# Altium PCB Balancing_Robot_1_1.PcbDoc (part 2 of 3)
Units mm, origin at the board's own origin, x right, y up, seen from the top; angles counter-clockwise.
Board outline 27 x 60 mm, 6 copper layers (Top Layer, Int1 (GND), Int2 (Sign), Int3 (Sign), Int4 (PWR), Bottom Layer), stack 1.571 mm thick; 139 components, 119 nets, 602 pads, 326 vias.
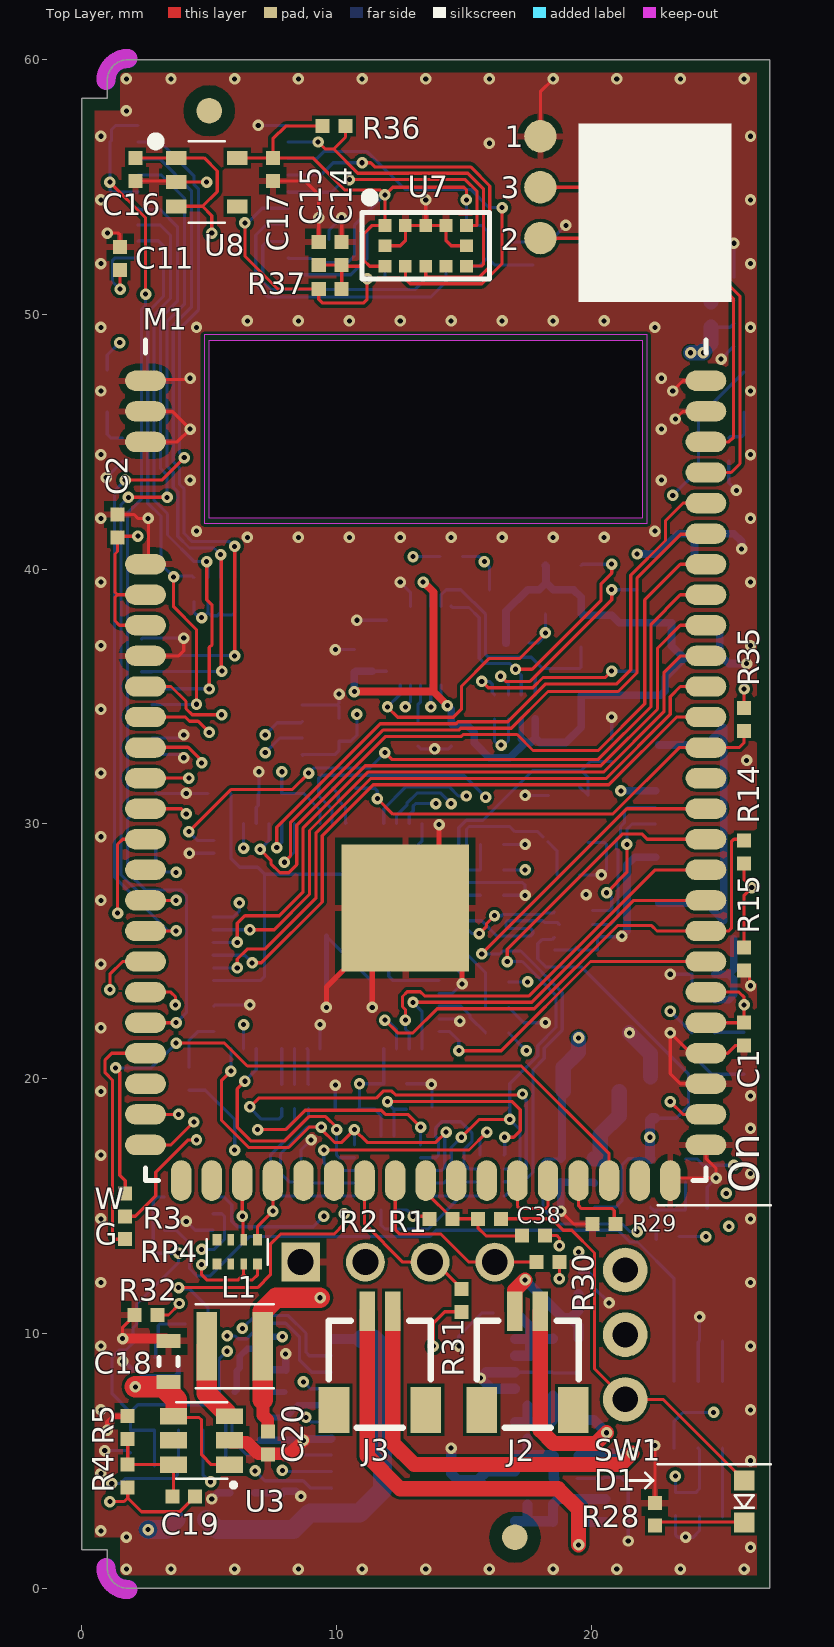
[diagram p0: Top Layer view]

## Part data (continued)
R9 R17: "RES 1M OHM 1/10W 1% 0402 SMD", Manufacturer="Panasonic Electronic Components", Manufacturer Part Number=ERJ-2RKF1004X, Package / Case="0402 (1005 Metric)", Power (Watts)="0.1W, 1/10W", Supplier Device Package=0402, Supplier Part Number 1=P1.00MLCT-ND, Temperature Coefficient=±100ppm/°C, Tolerance=±1%, Category=Resistors, ComponentLink1Description=http://industrial.panasonic.com/www-cgi/jvcr13pz.cgi?E+PZ+3+AOA0002+ERJ2RKF1004X+7+WW, ComponentLink1URL=http://industrial.panasonic.com/www-cgi/jvcr13pz.cgi?E+PZ+3+AOA0002+ERJ2RKF1004X+7+WW, Composition="Thick Film", Features=-, Height="0.016\" (0.40mm)", Number of Terminations=2, Packaging="Cut Tape (CT)", Pricing 1="1=0.07, 50=0.0128, 100=0.0097, 250=0.0072, 500=0.00532, 1000=0.00355, 5000=0.0025 (GBP)", Resistance (Ohms)=1M, RoHS="RoHS Compliant", Size / Dimension="0.039\" L x 0.020\" W (1.00mm x 0.50mm)", Stock 1=749171, Supplier 1=Digi-Key
R10 R14 R15 R26 R27 R30 R31: "RES 2.2K OHM 1/10W 1% 0402 SMD", Manufacturer="Panasonic Electronic Components", Manufacturer Part Number=ERJ-2RKF2201X, Package / Case="0402 (1005 Metric)", Power (Watts)="0.1W, 1/10W", Supplier Device Package=0402, Supplier Part Number 1=P2.20KLCT-ND, Temperature Coefficient=±100ppm/°C, Tolerance=±1%, Category=Resistors, ComponentLink1Description=http://industrial.panasonic.com/www-cgi/jvcr13pz.cgi?E+PZ+3+AOA0002+ERJ2RKF2201X+7+WW, ComponentLink1URL=http://industrial.panasonic.com/www-cgi/jvcr13pz.cgi?E+PZ+3+AOA0002+ERJ2RKF2201X+7+WW, Composition="Thick Film", Features=-, Height="0.016\" (0.40mm)", Number of Terminations=2, Packaging="Cut Tape (CT)", Pricing 1="1=0.07, 50=0.0128, 100=0.0097, 250=0.0072, 500=0.00532, 1000=0.00355, 5000=0.0025 (GBP)", Resistance (Ohms)=2.2K, RoHS="RoHS Compliant", Size / Dimension="0.039\" L x 0.020\" W (1.00mm x 0.50mm)", Stock 1=529147, Supplier 1=Digi-Key
R16: "RES 154K OHM 1/10W 1% 0402 SMD", Manufacturer="Panasonic Electronic Components", Manufacturer Part Number=ERJ-2RKF1543X, Package / Case="0402 (1005 Metric)", Power (Watts)="0.1W, 1/10W", Supplier Device Package=0402, Supplier Part Number 1=P154KLCT-ND, Temperature Coefficient=±100ppm/°C, Tolerance=±1%, Category=Resistors, ComponentLink1Description=http://industrial.panasonic.com/www-cgi/jvcr13pz.cgi?E+PZ+3+AOA0002+ERJ2RKF1543X+7+WW, ComponentLink1URL=http://industrial.panasonic.com/www-cgi/jvcr13pz.cgi?E+PZ+3+AOA0002+ERJ2RKF1543X+7+WW, Composition="Thick Film", Features=-, Height="0.016\" (0.40mm)", Number of Terminations=2, Packaging="Cut Tape (CT)", Pricing 1="1=0.07, 50=0.0128, 100=0.0097, 250=0.0072, 500=0.00532, 1000=0.00355, 5000=0.0025 (GBP)", Resistance (Ohms)=154K, RoHS="RoHS Compliant", Size / Dimension="0.039\" L x 0.020\" W (1.00mm x 0.50mm)", Stock 1=93656, Supplier 1=Digi-Key
R18: "RES 523K OHM 1/10W 1% 0402 SMD", Manufacturer="Panasonic Electronic Components", Manufacturer Part Number=ERJ-2RKF5233X, Package / Case="0402 (1005 Metric)", Power (Watts)="0.1W, 1/10W", Supplier Device Package=0402, Supplier Part Number 1=P523KLCT-ND, Temperature Coefficient=±100ppm/°C, Tolerance=±1%, Category=Resistors, ComponentLink1Description=http://industrial.panasonic.com/www-cgi/jvcr13pz.cgi?E+PZ+3+AOA0002+ERJ2RKF5233X+7+WW, ComponentLink1URL=http://industrial.panasonic.com/www-cgi/jvcr13pz.cgi?E+PZ+3+AOA0002+ERJ2RKF5233X+7+WW, Composition="Thick Film", Features=-, Height="0.016\" (0.40mm)", Number of Terminations=2, Packaging="Cut Tape (CT)", Pricing 1="1=0.07, 50=0.0128, 100=0.0097, 250=0.0072, 500=0.00532, 1000=0.00355, 5000=0.0025 (GBP)", Resistance (Ohms)=523K, RoHS="RoHS Compliant", Size / Dimension="0.039\" L x 0.020\" W (1.00mm x 0.50mm)", Stock 1=62611, Supplier 1=Digi-Key
R19: "RES 100 OHM 1/10W 1% 0402 SMD", Manufacturer="Panasonic Electronic Components", Manufacturer Part Number=ERJ-2RKF1000X, Package / Case="0402 (1005 Metric)", Power (Watts)="0.1W, 1/10W", Supplier Device Package=0402, Supplier Part Number 1=P100LCT-ND, Temperature Coefficient=±100ppm/°C, Tolerance=±1%, Category=Resistors, ComponentLink1Description=http://industrial.panasonic.com/www-cgi/jvcr13pz.cgi?E+PZ+3+AOA0002+ERJ2RKF1000X+7+WW, ComponentLink1URL=http://industrial.panasonic.com/www-cgi/jvcr13pz.cgi?E+PZ+3+AOA0002+ERJ2RKF1000X+7+WW, Composition="Thick Film", Features=-, Height="0.016\" (0.40mm)", Number of Terminations=2, Packaging="Cut Tape (CT)", Pricing 1="1=0.07, 50=0.0128, 100=0.0097, 250=0.0072, 500=0.00532, 1000=0.00355, 5000=0.0025 (GBP)", Resistance (Ohms)=100R, RoHS="RoHS Compliant", Size / Dimension="0.039\" L x 0.020\" W (1.00mm x 0.50mm)", Stock 1=3662159, Supplier 1=Digi-Key
R25: library part THREE-WAY-4K7-0402-NO-SHORT, "RES SMD 4.7K JUMPER 1/10W 0402", Manufacturer="Panasonic Electronic Components", Manufacturer Part Number=ERJ-2RKF4701X, Operating Temperature="-55°C ~ 155°C", Package / Case="0402 (1005 Metric)", Power (Watts)="0.1W, 1/10W", Supplier Device Package=0402, Supplier Part Number=P4.7KLCT-ND, Temperature Coefficient=-, Tolerance=Jumper, Category=Resistors, ComponentLink1Description=http://industrial.panasonic.com/www-cgi/jvcr13pz.cgi?E+PZ+3+AOA0001+ERJ2GE0R00X+7+WW, ComponentLink1URL=http://industrial.panasonic.com/www-cgi/jvcr13pz.cgi?E+PZ+3+AOA0001+ERJ2GE0R00X+7+WW, Composition="Thick Film", Features=-, Height="0.016\" (0.40mm)", Number of Terminations=2, Packaging="Cut Tape (CT)", Part Status=Active, Pricing 1="1=0.08, 50=0.0104, 100=0.0079, 250=0.00588, 500=0.00436, 1000=0.0029, 5000=0.00204 (GBP)", Resistance (Ohms)=4.7K, RoHS="RoHS Compliant", Size / Dimension="0.039\" L x 0.020\" W (1.00mm x 0.50mm)", Stock 1=3259868, Supplier 1=Digi-Key
R28 R33 R34: "RES 330 OHM 1/10W 1% 0402 SMD", Manufacturer="Panasonic Electronic Components", Manufacturer Part Number=ERJ-2RKF3300X, Package / Case="0402 (1005 Metric)", Power (Watts)="0.1W, 1/10W", Supplier Device Package=0402, Supplier Part Number 1=P330LCT-ND, Temperature Coefficient=±100ppm/°C, Tolerance=±1%, Category=Resistors, ComponentLink1Description=http://industrial.panasonic.com/www-cgi/jvcr13pz.cgi?E+PZ+3+AOA0002+ERJ2RKF3300X+7+WW, ComponentLink1URL=http://industrial.panasonic.com/www-cgi/jvcr13pz.cgi?E+PZ+3+AOA0002+ERJ2RKF3300X+7+WW, Composition="Thick Film", Features=-, Height="0.016\" (0.40mm)", Number of Terminations=2, Packaging="Cut Tape (CT)", Pricing 1="1=0.07, 50=0.0128, 100=0.0097, 250=0.0072, 500=0.00532, 1000=0.00355, 5000=0.0025 (GBP)", Resistance (Ohms)=330R, RoHS="RoHS Compliant", Size / Dimension="0.039\" L x 0.020\" W (1.00mm x 0.50mm)", Stock 1=586957, Supplier 1=Digi-Key
R29 R32: "RES 4.7K OHM 1/10W 1% 0402 SMD", Manufacturer="Panasonic Electronic Components", Manufacturer Part Number=ERJ-2RKF4701X, Package / Case="0402 (1005 Metric)", Power (Watts)="0.1W, 1/10W", Supplier Device Package=0402, Supplier Part Number 1=P4.70KLCT-ND, Temperature Coefficient=±100ppm/°C, Tolerance=±1%, Category=Resistors, ComponentLink1Description=http://industrial.panasonic.com/www-cgi/jvcr13pz.cgi?E+PZ+3+AOA0002+ERJ2RKF4701X+7+WW, ComponentLink1URL=http://industrial.panasonic.com/www-cgi/jvcr13pz.cgi?E+PZ+3+AOA0002+ERJ2RKF4701X+7+WW, Composition="Thick Film", Features=-, Height="0.016\" (0.40mm)", Number of Terminations=2, Packaging="Cut Tape (CT)", Pricing 1="1=0.07, 50=0.0128, 100=0.0097, 250=0.0072, 500=0.00532, 1000=0.00355, 5000=0.0025 (GBP)", Resistance (Ohms)=4.7K, RoHS="RoHS Compliant", Size / Dimension="0.039\" L x 0.020\" W (1.00mm x 0.50mm)", Stock 1=1251398, Supplier 1=Digi-Key
RP1 RP2: library part EXB-N8V510JX, "Res Thick Film Array 51 Ohm 5% ±200ppm/C ISOL Molded 8-Pin 0804(4 X 0402) Concave SMD Punched Carrier T/R", Manufacturer="Panasonic / Panasonic ECG", Power Rating per Element=31mW, Resistance=51ohm, Resistance Tolerance="± 5%", Resistor Case Style="0402 [1005 Metric]", Resistor Mounting=SMD, Resistor Terminals="(Not Available)", Supplier Part Number 1=Y10510CT-ND, Temperature Coefficient="± 200ppm/°C", Voltage Rating=50V, ComponentLink1Description=https://datasheet.ciiva.com/30072/aoc0000ce1-30072941.pdf, ComponentLink1URL=https://datasheet.ciiva.com/30072/aoc0000ce1-30072941.pdf, ComponentLink2Description=https://datasheet.ciiva.com/46376/1480003-46376333.pdf, ComponentLink2URL=https://datasheet.ciiva.com/46376/1480003-46376333.pdf, ComponentLink3Description=https://datasheet.ciiva.com/5735/1480003-5735263.pdf, ComponentLink3URL=https://datasheet.ciiva.com/5735/1480003-5735263.pdf, ComponentLink4Description=https://datasheet.ciiva.com/28637/1790599-28637093.pdf, ComponentLink4URL=https://datasheet.ciiva.com/28637/1790599-28637093.pdf, ComponentLink5Description=https://datasheet.ciiva.com/46388/1480003-46388069.pdf, ComponentLink5URL=https://datasheet.ciiva.com/46388/1480003-46388069.pdf, ComponentLink6Description=https://datasheet.ciiva.com/15157/getdatasheetpartid-183543-15157943.pdf, ComponentLink6URL=https://datasheet.ciiva.com/15157/getdatasheetpartid-183543-15157943.pdf, Manufacturer Part Number=EXB-N8V510JX, Network Circuit Type=Isolated, No. of Elements=4, No. of Pins=8, Packaging="Cut Tape", Pricing 1="1=0.1, 10=0.075, 25=0.0544, 50=0.0414, 100=0.0305, 250=0.0233, 500=0.0186, 1000=0.0137, 5000=0.0098 (USD)", Stock 1=62555, Supplier 1=Digikey, SVHC="Diboron trioxide (19-Dec-2012)", SVHC (Secondary)="Lead monoxide (lead oxide) (19-Dec-2012)"
RP3: library part EXB-N8V472JX, "Res Thick Film Array 4.7K Ohm 5% ±200ppm/C ISOL Molded 8-Pin 0804(4 X 0402) Concave SMD Punched Carrier T/R", Manufacturer="Panasonic / Panasonic ECG", Power Rating per Element=31mW, Resistance=4.7kohm, Resistance Tolerance="± 5%", Resistor Case Style="0402 [1005 Metric]", Resistor Mounting=SMD, Resistor Terminals="(Not Available)", Supplier Part Number 1=Y10472CT-ND, Temperature Coefficient="± 200ppm/°C", Voltage Rating=50V, ComponentLink1Description=https://datasheet.ciiva.com/5735/1480003-5735259.pdf, ComponentLink1URL=https://datasheet.ciiva.com/5735/1480003-5735259.pdf, ComponentLink2Description=https://datasheet.ciiva.com/46376/1480003-46376271.pdf, ComponentLink2URL=https://datasheet.ciiva.com/46376/1480003-46376271.pdf, ComponentLink3Description=https://datasheet.ciiva.com/30229/aoc0000ce1-30229813.pdf, ComponentLink3URL=https://datasheet.ciiva.com/30229/aoc0000ce1-30229813.pdf, ComponentLink4Description=https://datasheet.ciiva.com/46387/1480003-46387943.pdf, ComponentLink4URL=https://datasheet.ciiva.com/46387/1480003-46387943.pdf, Manufacturer Part Number=EXB-N8V472JX, Network Circuit Type=Isolated, No. of Elements=4, No. of Pins=8, Packaging="Cut Tape", Pricing 1="1=0.1, 10=0.075, 25=0.0544, 50=0.0414, 100=0.0305, 250=0.0233, 500=0.0186, 1000=0.0137, 5000=0.0098 (USD)", Stock 1=38086, Supplier 1=Digikey, SVHC="Diboron trioxide (19-Dec-2012)", SVHC (Secondary)="Lead monoxide (lead oxide) (19-Dec-2012)"
RP4 RP6: library part EXB-N8V222JX, "Res Thick Film Array 2K2 Ohm 5% ±200ppm/C ISOL Molded 8-Pin 0804(4 X 0402) Concave SMD Punched Carrier T/R", Case Code (Imperial)=0402, Case Code (Metric)=1005, Manufacturer="Panasonic / Panasonic ECG", Power Rating per Element=31mW, Resistance=2.2kohm, Resistance Tolerance="± 5%", Resistor Case Style="0402 [1005 Metric]", Resistor Mounting=SMD, Resistor Terminals="(Not Available)", Supplier Part Number 1=Y10222CT-ND, Temperature Coefficient="± 200ppm/°C", Voltage Rating=50V, ComponentLink1Description=https://datasheet.ciiva.com/28637/1790599-28637084.pdf, ComponentLink1URL=https://datasheet.ciiva.com/28637/1790599-28637084.pdf, ComponentLink2Description=https://datasheet.ciiva.com/46388/1480003-46388015.pdf, ComponentLink2URL=https://datasheet.ciiva.com/46388/1480003-46388015.pdf, ComponentLink3Description=https://datasheet.ciiva.com/5735/1480003-5735240.pdf, ComponentLink3URL=https://datasheet.ciiva.com/5735/1480003-5735240.pdf, ComponentLink4Description=https://datasheet.ciiva.com/30142/aoc0000ce1-30142629.pdf, ComponentLink4URL=https://datasheet.ciiva.com/30142/aoc0000ce1-30142629.pdf, ComponentLink5Description=https://datasheet.ciiva.com/46376/1480003-46376278.pdf, ComponentLink5URL=https://datasheet.ciiva.com/46376/1480003-46376278.pdf, Manufacturer Part Number=EXB-N8V222JX, Network Circuit Type=Isolated, No. of Elements=4, No. of Pins=8, Packaging="Cut Tape", Pricing 1="1=0.1, 10=0.075, 25=0.0544, 50=0.0414, 100=0.0305, 250=0.0233, 500=0.0186, 1000=0.0137, 5000=0.0098 (USD)", Stock 1=17267, Supplier 1=Digikey, SVHC="Diboron trioxide (19-Dec-2012)", SVHC (Secondary)="Lead monoxide (lead oxide) (19-Dec-2012)"
SW1: "SWITCH SLIDE SPDT 500MA 12V", Current Rating=500mA, Manufacturer="Nidec Copal", Max Operating Temperature=85°C, Min Operating Temperature=-40°C, Operating Force=255gf, Supplier Part Number 1=563-1386-ND, Voltage Rating (DC)=12V, Actuator Length=1.4mm, Actuator Type=Standard, ComponentLink1Description=https://datasheet.ciiva.com/18516/02682-18516832.pdf?src-supplier=Digi-Key, ComponentLink1URL=https://datasheet.ciiva.com/18516/02682-18516832.pdf?src-supplier=Digi-Key, Contact Material=Gold, Contact Style=Non-Shorting, Electrical Life=2000Cycles, Lead Free="Lead Free", Manufacturer Part Number=CL-SA-12C4-02, Mechanical Life=10000Cycles, Mount="Through Hole", Packaging=Bulk, Pricing 1="1=2.65000, 10=2.54200, 25=2.48760, 50=2.16320, 100=2.10910, 250=2.05504, 500=1.73056, 1000=1.62240, 5000=1.48720 (USD)", RoHS=Yes, Stock 1=458, Supplier 1=Digi-Key, Switch Function=On-On, Switch Travel=1.6mm, Termination="PC Pin", Throw Configuration=SPDT
U1: "9-axis IMU", Manufacturer=TDK, Supplier Part Number 1=2911498RL, ComponentLink1Description=http://www.farnell.com/datasheets/2632662.pdf?src-supplier=Farnell, ComponentLink1URL=http://www.farnell.com/datasheets/2632662.pdf?src-supplier=Farnell, Manufacturer Part Number=ICM-20948, Pricing 1="150=3.40000, 250=3.21000, 500=3.10000 (GBP)", RoHS=No, Stock 1=0, Supplier 1=Farnell
U2: "DC Motor Driver 3V 24-Pin SSOP T/R", Case/Package=SSOP, Manufacturer=Toshiba, Manufacturer Part Number=TB6612FNG,C,8,EL, Max Operating Temperature=85°C, Max Supply Voltage=5.5V, Min Operating Temperature=-20°C, Min Supply Voltage=2.7V, Operating Supply Voltage=3V, Output Current=1A, Package Quantity=1, Supplier Part Number 1=TB6612FNGC8ELCT-ND, ComponentLink1Description=https://datasheet.ciiva.com/12216/tb6612fng-datasheet-en-20141001-12216529.pdf?src-supplier=Mouser, ComponentLink1URL=https://datasheet.ciiva.com/12216/tb6612fng-datasheet-en-20141001-12216529.pdf?src-supplier=Mouser, Interface=Parallel, Logic Function=AND, Mount="Surface Mount", Number of Outputs=2, Number of Pins=24, Packaging="Tape and Reel", Pricing 1="1=1.95000, 10=1.74900, 25=1.65000, 100=1.32000, 250=1.15500, 500=1.12200, 1000=0.89100 (USD)", RoHS=Yes, Stock 1=11070, Supplier 1=Digi-Key
U3 U14: "Variable voltage buck converter", Case/Package=SOT-23-5, Manufacturer="Texas Instruments", Max Operating Temperature=125°C, Min Operating Temperature=-40°C, Supplier Part Number 1=296-47360-6-ND, Manufacturer Part Number=TLV62569DBVR, Pricing 1="1=1.32, 10=1.176, 100=0.9168, 500=0.75736, 1000=0.59792 (USD)", Stock 1=4987, Supplier 1=Digi-Key
U4: "TEXAS INSTRUMENTS         PCA9546APWR             ANALOG MULTIPLEXER, QUAD 4 X 1, TSSOP-16, FULL REEL", Case/Package=TSSOP, Manufacturer="Texas Instruments", Max Frequency=400kHz, Max Operating Temperature=85°C, Max Power Dissipation=400mW, Max Supply Voltage=5.5V, Min Operating Temperature=-40°C, Min Supply Voltage=2.3V, On-State Resistance=16R, Operating Supply Current=8uA, Package Quantity=2000, Quiescent Current=3uA, Supplier Part Number 1=296-20968-1-ND, Bandwidth=400kHz, ComponentLink1Description=https://datasheet.ciiva.com/15087/getdatasheetpartid-347185-15087370.pdf?src-supplier=Verical, ComponentLink1URL=https://datasheet.ciiva.com/15087/getdatasheetpartid-347185-15087370.pdf?src-supplier=Verical, ComponentLink2Description=https://datasheet.ciiva.com/26839/pca9546apwr-26839938.pdf?src-supplier=IIIC, ComponentLink2URL=https://datasheet.ciiva.com/26839/pca9546apwr-26839938.pdf?src-supplier=IIIC, ComponentLink3Description=https://datasheet.ciiva.com/1784/pca9546a-1784239.pdf?src-supplier=Digi-Key, ComponentLink3URL=https://datasheet.ciiva.com/1784/pca9546a-1784239.pdf?src-supplier=Digi-Key, ComponentLink4Description=https://datasheet.ciiva.com/1784/pca9546a-1784237.pdf?src-supplier=Digi-Key, ComponentLink4URL=https://datasheet.ciiva.com/1784/pca9546a-1784237.pdf?src-supplier=Digi-Key, ComponentLink5Description=https://datasheet.ciiva.com/1784/pca9546a-1784238.pdf?src-supplier=Digi-Key, ComponentLink5URL=https://datasheet.ciiva.com/1784/pca9546a-1784238.pdf?src-supplier=Digi-Key, Contact Plating=Gold, Lead Free="Lead Free", Logic Function=Multiplexer, Manufacturer Part Number=PCA9546APWR, Number of Channels=4, Number of Circuits=4, Number of Inputs=4, Number of Outputs=1, Number of Pins=16, Packaging="Tape and Reel", Power Dissipation=400mW, Pricing 1="1=1.89000, 10=1.70100, 25=1.60520, 100=1.28400, 250=1.12352, 500=1.09140, 1000=0.86670 (USD)", Propagation Delay=1ns, Radiation Hardening=No, REACH SVHC="No SVHC", RoHS=Yes, Stock 1=4404, Supplier 1=Digi-Key, Throw Configuration=4PST, Weight=0.002183oz
U5: "IC 8BIT NON-INV TRANSLTR 20TSSOP", Case/Package=TSSOP, High Level Output Current=-50mA, Low Level Output Current=50mA, Manufacturer="Texas Instruments", Max Operating Temperature=85°C, Max Supply Voltage=5.5V, Min Operating Temperature=-40°C, Min Supply Voltage=1.2V, Nominal Supply Current=8uA, Output Current=620uA, Package Quantity=1, Quiescent Current=3uA, Supplier Part Number 1=296-23011-1-ND, ComponentLink1Description=https://datasheet.ciiva.com/14287/txs0108e-14287280.pdf?src-supplier=Farnell, ComponentLink1URL=https://datasheet.ciiva.com/14287/txs0108e-14287280.pdf?src-supplier=Farnell, ComponentLink2Description=https://datasheet.ciiva.com/15096/getdatasheetpartid-322119-15096276.pdf?src-supplier=Verical, ComponentLink2URL=https://datasheet.ciiva.com/15096/getdatasheetpartid-322119-15096276.pdf?src-supplier=Verical, ComponentLink3Description=https://datasheet.ciiva.com/28653/1714661-28653429.pdf?src-supplier=Element14, ComponentLink3URL=https://datasheet.ciiva.com/28653/1714661-28653429.pdf?src-supplier=Element14, ComponentLink4Description=https://datasheet.ciiva.com/4834/sces642b-127094-4834401.pdf?src-supplier=Mouser, ComponentLink4URL=https://datasheet.ciiva.com/4834/sces642b-127094-4834401.pdf?src-supplier=Mouser, ComponentLink5Description=https://datasheet.ciiva.com/1508/1815244-1508732.pdf?src-supplier=Element14, ComponentLink5URL=https://datasheet.ciiva.com/1508/1815244-1508732.pdf?src-supplier=Element14, ComponentLink6Description=https://datasheet.ciiva.com/1899/txs0108e-1899604.pdf?src-supplier=Digi-Key, ComponentLink6URL=https://datasheet.ciiva.com/1899/txs0108e-1899604.pdf?src-supplier=Digi-Key, ComponentLink7Description=https://datasheet.ciiva.com/1899/txs0108e-1899605.pdf?src-supplier=Digi-Key, ComponentLink7URL=https://datasheet.ciiva.com/1899/txs0108e-1899605.pdf?src-supplier=Digi-Key, ComponentLink8Description=https://datasheet.ciiva.com/1899/txs0108e-1899606.pdf?src-supplier=Digi-Key, ComponentLink8URL=https://datasheet.ciiva.com/1899/txs0108e-1899606.pdf?src-supplier=Digi-Key, ComponentLink9Description=https://datasheet.ciiva.com/14287/txs0108e-14287532.pdf?src-supplier=Avnet, ComponentLink9URL=https://datasheet.ciiva.com/14287/txs0108e-14287532.pdf?src-supplier=Avnet, ComponentLink10Description=https://datasheet.ciiva.com/26039/txs0108e-26039599.pdf?src-supplier=Avnet+Europe, ComponentLink10URL=https://datasheet.ciiva.com/26039/txs0108e-26039599.pdf?src-supplier=Avnet+Europe, Contact Plating=Gold, Data Rate=60Mbps, Height=1.15mm, Lead Free="Lead Free", Length=6.5mm, Logic Function=Translator, Manufacturer Part Number=TXS0108EPWR, Mount="Surface Mount", Number of Bits=8, Number of Channels=8, Number of Inputs=8, Number of Pins=20, Output Type=Voltage, Packaging="Tape and Reel", Pricing 1="1=1.61000, 10=1.44700, 25=1.36520, 100=1.16300, 250=1.09200, 500=0.95550, 1000=0.79170 (USD)", Propagation Delay=4.8ns, Radiation Hardening=No, REACH SVHC="No SVHC", Rise Time=6.3ns, RoHS=Yes, Stock 1=13915, Supplier 1=Digi-Key, Termination=SMD/SMT, Turn-On Delay Time=312ns, Weight=0.002716oz, Width=4.4mm
U6 U7: "OPTICAL LGA12 4.9X2", Manufacturer=STMicroelectronics, Max Operating Temperature=85°C, Min Operating Temperature=-20°C, Supplier Part Number 1=2851946, ComponentLink1Description=http://www.farnell.com/datasheets/2600105.pdf?src-supplier=Farnell, ComponentLink1URL=http://www.farnell.com/datasheets/2600105.pdf?src-supplier=Farnell, ComponentLink2Description=http://www.st.com/content/ccc/resource/technical/document/datasheet/group3/7d/85/c8/95/fb/3b/4e/2d/DM00452094/files/DM00452094.pdf/jcr:content/translations/en.DM00452094.pdf?src-supplier=Digi-Key, ComponentLink2URL=http://www.st.com/content/ccc/resource/technical/document/datasheet/group3/7d/85/c8/95/fb/3b/4e/2d/DM00452094/files/DM00452094.pdf/jcr:content/translations/en.DM00452094.pdf?src-supplier=Digi-Key, Manufacturer Part Number=VL53L1CXV0FY/1, Output Type=I2C, Pricing 1="1=5.68000, 10=4.66000, 25=4.44000, 50=4.15000, 100=3.85000, 250=3.69000, 500=2.93000 (GBP)", RoHS=No, Stock 1=2567, Supplier 1=Farnell
U8: "Reverse Current Protection, 700mA High Speed LDO Regulator", Case/Package=SOT-25, Dropout Voltage=160mV, Manufacturer=Torex, Max Input Voltage=6V, Max Operating Temperature=85°C, Max Power Dissipation=250mW, Min Current Limit=720mA, Min Input Voltage=1.7V, Min Operating Temperature=-40°C, Output Current=700mA, Output Voltage=2.8V, Package Quantity=1, Supplier Part Number 1=893-1141-1-ND, Accuracy=1%, ComponentLink1Description=https://datasheet.ciiva.com/2048/xc6222-2048816.pdf?src-supplier=Digi-Key, ComponentLink1URL=https://datasheet.ciiva.com/2048/xc6222-2048816.pdf?src-supplier=Digi-Key, ComponentLink2Description=https://datasheet.ciiva.com/28427/xc6222-28427291.pdf?src-supplier=Avnet+Europe, ComponentLink2URL=https://datasheet.ciiva.com/28427/xc6222-28427291.pdf?src-supplier=Avnet+Europe, ComponentLink3Description=https://datasheet.ciiva.com/2048/xc6222-2048817.pdf?src-supplier=Digi-Key, ComponentLink3URL=https://datasheet.ciiva.com/2048/xc6222-2048817.pdf?src-supplier=Digi-Key, ComponentLink4Description=https://datasheet.ciiva.com/2048/xc6222-2048815.pdf?src-supplier=Digi-Key, ComponentLink4URL=https://datasheet.ciiva.com/2048/xc6222-2048815.pdf?src-supplier=Digi-Key, Manufacturer Part Number=XC6222B281MR-G, Mount="Surface Mount", Number of Outputs=1, Number of Regulators=1, Output Type=Fixed, Packaging="Cut Tape", Polarity=Positive, Pricing 1="1=0.80000, 10=0.70300, 25=0.66040, 100=0.50060, 250=0.42600, 500=0.40470, 1000=0.30885 (USD)", Radiation Hardening=No, RoHS=Yes, Stock 1=3964, Supplier 1=Digi-Key
U9: "IC USB HS QUAD UART/SYNC 64-QFN", Current - Supply=70mA, Manufacturer="FTDI, Future Technology Devices International Ltd", Manufacturer Part Number=FT4232HQ-REEL, Operating Temperature="-40°C ~ 85°C", Package / Case="64-VFQFN Exposed Pad", Supplier Device Package="64-QFN (9x9)", Supplier Part Number 1=768-1027-1-ND, Voltage - Supply="3 V ~ 3.6 V", Category="Integrated Circuits (ICs)", ComponentLink1Description=http://www.ftdichip.com/Support/Documents/DataSheets/ICs/DS_FT4232H.pdf, ComponentLink1URL=http://www.ftdichip.com/Support/Documents/DataSheets/ICs/DS_FT4232H.pdf, Function="Bridge, USB to UART", Interface=UART, Packaging="Cut Tape (CT)", Pricing 1="1=5.99, 10=5.785, 50=5.5452, 100=4.6827, 250=4.1692, 500=3.79954 (GBP)", Protocol=USB, RoHS="RoHS Compliant", Standards="USB 2.0", Stock 1=18296, Supplier 1=Digi-Key
U10: "IC FILTER COMMON MODE ESD 8WDFN", Current=100mA, DC Resistance (DCR)="8 Ohm", Inductance=-, Manufacturer="ON Semiconductor", Operating Temperature="-40°C ~ 85°C", Package / Case="8-WFDFN Exposed Pad", Standard Package=1, Supplier Part Number 1=EMI2121MTTAGOSCT-ND, Category=Filters, ComponentLink1Description=https://datasheet.ciiva.com/3067/emi2121mt-d-3067884.pdf, ComponentLink1URL=https://datasheet.ciiva.com/3067/emi2121mt-d-3067884.pdf, ComponentLink2Description=https://datasheet.ciiva.com/12394/emi2121mt-d-72518-12394918.pdf, ComponentLink2URL=https://datasheet.ciiva.com/12394/emi2121mt-d-72518-12394918.pdf, ComponentLink3Description=https://datasheet.ciiva.com/6214/emi2121mt-d-6214625.pdf, ComponentLink3URL=https://datasheet.ciiva.com/6214/emi2121mt-d-6214625.pdf, ComponentLink4Description=https://datasheet.ciiva.com/16437/emi2121mt-d-16437709.pdf, ComponentLink4URL=https://datasheet.ciiva.com/16437/emi2121mt-d-16437709.pdf, ComponentLink5Description=https://datasheet.ciiva.com/6214/emi2121mt-d-6214622.pdf, ComponentLink5URL=https://datasheet.ciiva.com/6214/emi2121mt-d-6214622.pdf, ComponentLink6Description=https://datasheet.ciiva.com/6214/emi2121mt-d-6214619.pdf, ComponentLink6URL=https://datasheet.ciiva.com/6214/emi2121mt-d-6214619.pdf, ComponentLink7Description=https://datasheet.ciiva.com/15162/getdatasheetpartid-686641-15162525.pdf, ComponentLink7URL=https://datasheet.ciiva.com/15162/getdatasheetpartid-686641-15162525.pdf, Family="Common Mode Chokes", Filter Type="Data, Signal Line", Height (Max)="0.031\" (0.80mm)", Impedance=-, Manufacturer Part Number=EMI2121MTTAG, Mounting Type="Surface Mount", Number of Lines=2, Online Catalog=EMI, Other Names=EMI2121MTTAGOSDKR, Packaging=Digi-Reel®, PCN Assembly/Origin="DFN Pkg Filters 12/Jun/2013 Addition of FAB 10 Wafer Source 04/Nov/2013 Assembly Site Addition 06/Mar/2014", Pricing 1="1=0.85, 10=0.76, 100=0.5923, 500=0.4893, 1000=0.3863 (USD)", Series=-, Size / Dimension="0.087\" L x 0.079\" W (2.20mm x 2.00mm)", Stock 1=2368, Supplier 1=Digikey
U11: "IC GATE AND 1CH 2-INP SC-70-5", Current - Output High, Low="32mA, 32mA", Current - Quiescent (Max)=2µA, Manufacturer="Fairchild Semiconductor", Operating Temperature="-40°C ~ 85°C", Package / Case="5-TSSOP, SC-70-5, SOT-353", Supplier Device Package=SC-70-5, Supplier Part Number 1=NC7SZ08P5XCT-ND, Voltage - Supply="1.65 V ~ 5.5 V", Category="Integrated Circuits (ICs)", ComponentLink1Description=http://www.fairchildsemi.com/datasheets/NC/NC7SZ08.pdf, ComponentLink1URL=http://www.fairchildsemi.com/datasheets/NC/NC7SZ08.pdf, Features=-, Logic Level - High=-, Logic Level - Low=-, Logic Type="AND Gate", Manufacturer Part Number=NC7SZ08P5X, Max Propagation Delay @ V, Max CL="4.5ns @ 5V, 50pF", Mounting Type="Surface Mount", Number of Circuits=1, Number of Inputs=2, Packaging="Cut Tape (CT)", Part Status=Active, Pricing 1="1=0.26, 10=0.216, 100=0.1144, 500=0.07526, 1000=0.05127 (GBP)", RoHS="RoHS Compliant", Stock 1=29087, Supplier 1=Digi-Key
U12: "LINEAR TECHNOLOGY - LTC6993CS6-2#TRMPBF - GENERATOR, PULSE, TIMERBLOX, 6SOT-23", Digital IC Case=TSOT-23, Frequency=-, Manufacturer="LINEAR TECHNOLOGY", Operating Mode=Monostable, Operating Temperature Max=70, Operating Temperature Min=0, Operating Temperature Range="0°C to +70", Resonator Case=SMD, Supplier Part Number 1=1848054, Supply Voltage Max=5.5, Supply Voltage Min=2.25, Supply Voltage Range="2.25V to 5.5V<!--FANDB--><div class=\"features-and-benefits-container\"><div class=\"features-and-benefits-description\"><span class=\"features-benefits-value\">The LTC6993CS6-2#TRMPBF is a Monostable Pulse Generator (one shot) with a programmable pulse width of 1?s to 33.6 seconds. The LTC6993 is part of the TimerBlox&reg", Clock External Input=No, ComponentLink1Description=http://www.farnell.com/datasheets/1441932.pdf, ComponentLink1URL=http://www.farnell.com/datasheets/1441932.pdf, ComponentLink2Description=http://www.farnell.com/simulation/1753930.zip, ComponentLink2URL=http://www.farnell.com/simulation/1753930.zip, ComponentLink3Description=http://www.farnell.com/datasheets/1999324.pdf, ComponentLink3URL=http://www.farnell.com/datasheets/1999324.pdf, ComponentLink4Description=http://www.farnell.com/cad/1542631.zip, ComponentLink4URL=http://www.farnell.com/cad/1542631.zip, Manufacturer Part Number=LTC6993CS6-2#TRMPBF, MSL="MSL 1 - Unlimited", No. of Pins=6, No. of Timers=1, Packaging="Cut Tape", Pricing 1="1=2.64, 25=2.02, 100=1.18 (GBP)", Product Range=-, RoHS=YES, Stock 1=1214, Supplier 1=Farnell, SVHC="No SVHC (17-Dec-2015)"
U13: "IC EEPROM 2KBIT 2MHZ SOT23-6", Manufacturer="Microchip Technology", Operating Temperature="-40°C ~ 85°C (TA)", Package / Case=SOT-23-6, Supplier Part Number 1=93LC56BT-I/OTCT-ND, Voltage - Supply="2.5 V ~ 5.5 V", Category="Integrated Circuits (ICs)", ComponentLink1Description=http://www.microchip.com/mymicrochip/filehandler.aspx?ddocname=en013939, ComponentLink1URL=http://www.microchip.com/mymicrochip/filehandler.aspx?ddocname=en013939, Format - Memory="EEPROMs - Serial", Interface="Microwire, 3-Wire Serial", Manufacturer Part Number=93LC56BT-I/OT, Memory Size="2K (128 x 16)", Memory Type=EEPROM, Packaging="Cut Tape (CT)", Part Status=Active, Pricing 1="1=0.17, 25=0.164, 100=0.1612 (GBP)", RoHS="RoHS Compliant", Speed=2MHz, Stock 1=13464, Supplier 1=Digi-Key, Supplier Device Package=SOT-23-6
U15: "IC BUFFER QUAD LV N-INV 14DQFN", High Level Output Current=-24mA, Low Level Output Current=24mA, Manufacturer="Fairchild Semiconductor", Max Operating Temperature=85°C, Max Supply Voltage=3.6V, Min Operating Temperature=-40°C, Min Supply Voltage=2V, Package Quantity=3000, Quiescent Current=10uA, Supplier Part Number 1=74LCX126BQXDKR-ND, ComponentLink1Description=https://datasheet.ciiva.com/26861/74lcx126bqx-26861526.pdf, ComponentLink1URL=https://datasheet.ciiva.com/26861/74lcx126bqx-26861526.pdf, ComponentLink2Description=https://datasheet.ciiva.com/1837/74lcx126-1837158.pdf, ComponentLink2URL=https://datasheet.ciiva.com/1837/74lcx126-1837158.pdf, ComponentLink3Description=https://datasheet.ciiva.com/28425/74lcx126-28425643.pdf, ComponentLink3URL=https://datasheet.ciiva.com/28425/74lcx126-28425643.pdf, ComponentLink4Description=https://datasheet.ciiva.com/1837/74lcx126-1837156.pdf, ComponentLink4URL=https://datasheet.ciiva.com/1837/74lcx126-1837156.pdf, ComponentLink5Description=https://datasheet.ciiva.com/1837/74lcx126-1837157.pdf, ComponentLink5URL=https://datasheet.ciiva.com/1837/74lcx126-1837157.pdf, ComponentLink6Description=https://datasheet.ciiva.com/8306/74lcx126-8306053.pdf, ComponentLink6URL=https://datasheet.ciiva.com/8306/74lcx126-8306053.pdf, Contact Plating=Gold, Lead Free="Lead Free", Logic Function=Buffer,Inverting, Manufacturer Part Number=74LCX126BQX, Mount="Surface Mount", Number of Bits=4, Number of Bits per Element=1, Number of Channels=4, Number of elements=4, Number of Input Lines=4, Number of Inputs=4, Number of Output Lines=4, Number of Outputs=4, Number of Pins=14, Packaging="Tape and Reel", Polarity=Non-Inverting, Pricing 1="1=0.85, 10=0.744, 100=0.5702, 500=0.4507, 1000=0.3606 (USD)", Propagation Delay=7.8ns, Radiation Hardening=No, Stock 1=15117, Supplier 1=Digi-Key, Turn-On Delay Time=7.8ns, Weight=0.12g
U16: "TOREX         XC6206P182MR             Fixed LDO Voltage Regulator, 1.8V to 6V, 150mV Dropout, 1.8Vout, 80mAout, SOT-23-3", Dropout Voltage Vdo=150mV, Input Voltage Max=6V, Input Voltage Min=1.8V, LDO Regulator Case Style=SOT-23, Manufacturer="Torex Semiconductor", Operating Temperature Max=85°C, Operating Temperature Min=-40°C, Output Current=80mA, Supplier Part Number 1=8796920, ComponentLink1Description=https://datasheet.ciiva.com/22710/578820-22710965.pdf, ComponentLink1URL=https://datasheet.ciiva.com/22710/578820-22710965.pdf, Manufacturer Part Number=XC6206P182MR, No. of Pins=3Pins, Output Voltage Nom.=1.8V, Packaging="Cut Tape", Pricing 1="1=0.531, 10=0.435, 100=0.357, 250=0.296, 500=0.262, 1000=0.237, 2000=0.233, 6000=0.227 (EUR)", Stock 1=6277, Supplier 1=Farnell, SVHC="No SVHC (17-Dec-2015)"
X1: library part "CRYSTAL 12MHz 18pF SMD", "CRYSTAL 12.000 MHZ 18PF SMD", Frequency Stability=±30ppm, Load Capacitance=18pF, Manufacturer="TXC CORPORATION", Manufacturer Part Number=8Z-12.000MAAJ-T, Operating Mode=Fundamental, Operating Temperature="-20°C ~ 70°C", Package / Case="4-SMD, No Lead (DFN, LCC)", Shunt capacitance="3.0pF max.", Supplier Part Number 1=887-1487-1-ND, Category="Crystals and Oscillators", ComponentLink1Description=http://www.txccrystal.com/images/pdf/8z.pdf, ComponentLink1URL=http://www.txccrystal.com/images/pdf/8z.pdf, ESR="100R max", Frequency=12MHz, Frequency Tolerance=±30ppm, Height="0.022\" (0.55mm)", Mounting Type="Surface Mount", Packaging="Cut Tape (CT)", Pricing 1="1=1.55, 10=1.347, 50=1.1812, 100=0.9326, 500=0.78752, 1000=0.62172 (GBP)", RoHS="RoHS Compliant", Size / Dimension="0.098\" L x 0.079\" W (2.50mm x 2.00mm)", Stock 1=5365, Supplier 1=Digi-Key, Type="MHz Crystal"
DS1: ComponentLink1Description=Supplier, ComponentLink1URL=https://www.amazon.co.uk/gp/product/B07BDFXFRK/ref=ppx_yo_dt_b_asin_title_o08_s00?ie=UTF8&psc=1

## Free pads (board coordinates)
  round 1 smd paste-1 mask+0.5: 1(5,58) 1(17,2)
  round 1 smd far side paste-1 mask+0.5: 1(13,57) 1(25,12)

## Via types
v1: diameter 0.45, hole 0.2, Top Layer to Bottom Layer, tented both sides, 326 vias

## Nets (pads, with @x,y where several pads share a name; then routed paths per layer and width w, separated by ;. In a path a pad name is that pad's centre, name@x,y a point inside that pad or via, vN(x,y) a via of type N, cw(c..) or ccw(c..) an arc to the next point about the centre after c; other vN are vias at no path point)
1V8: C7.2 C9.2 C37.2 Q1.1 Q2.1 Q3.1 R26.1 RP6.6 RP6.8 U1.8 U1.13 U1.22 U16.2 | length 39.2
  Top Layer w0.3: v1(10.7,35.2) 13.807,35.2 ; v1@13.4,39.459 v1(13.4,39.5) 13.807,39.093 13.807,35.2 ; v1(14.35,34.65) 14.35,34.657 13.807,35.2
  Bottom Layer w0.125: 11.4,36 U1.13@11.95,36 ; v1(13.4,39.5) 13.7,39.2 U1.22@13.7,38.55 ; U1.8@14.1,35.45 14.1,34.9 v1@14.2,34.8
  Bottom Layer w0.2: 17.25,33.35 RP6.6@17.25,34.125
  Bottom Layer w0.3: v1(10.7,35.2) C9.2@10.7,35.95 10.75,36 11.4,36 ; v1@14.2,34.8 v1(14.35,34.65) 14.5,34.5 C7.2@14.5,33.95 14.55,33.9 15.1,33.9 15.4,33.6 15.4,33.2 16,32.6 16.8,32.6 17.4,33.2 ; R26.1@16.65,37.1 16.65,38.35 17.5,39.2 17.949,39.2 18.224,39.476 ; 17.25,33.35 17.4,33.2 ; RP6.8@17.8,34.125 17.8,33.376 ; Q3.1@18.2,40.15 18.224,40.126 18.224,39.476 ; 17.4,33.2 17.624,33.2 17.8,33.376 ; 17.8,33.376 17.976,33.2 19,33.2 19.6,33.8 Q2.1@19.6,35.05 22.724,35.05 22.9,35.226 22.9,35.75 C37.2@23.65,36.5 23.15,37 U16.2@23.15,37.9 21.1,37.9 20.8,38.2 19.65,38.2 Q1.1@19.6,38.25 19.6,38.9 19.3,39.2 18.5,39.2 18.224,39.476
2V8: C12.2 C13.2 C14.2 C15.2 C17.2 C21.2 R36.1 R37.1 U5.19 U6.1 U6.11 U7.1 U7.11 U8.5 | length 31.6
  Top Layer w0.125: U8.5@6.1,56.15 C17.2@7.5,56.15 ; C15.2@9.3,51.95 C14.2@10.2,51.95 ; R36.1@9.45,57.4 8,57.4 7.5,56.9 C17.2@7.5,56.15 ; R37.1@10.2,51 C14.2@10.2,51.95 ; U7.11@11.9,51.9 11.3,51.9 11.075,52.125 ; v1(15.1,54.5) 15.1,54.9 15,55 12.2,55 v1(11.9,54.7) ; C17.2@7.5,56.15 9.067,56.15 10.329,54.887 11.713,54.887 v1(11.9,54.7) ; C14.2@10.2,51.95 10.25,51.9 10.9,51.9 11.075,52.075 11.075,52.125 ; 11.075,52.125 11.075,53.175 11.4,53.5 U7.1@11.9,53.5 11.9,54.5 v1(11.9,54.7)
  Bottom Layer w0.125: U5.19@8.1,52.225 8.125,52.2 9,52.2 9.15,52.05 C21.2@9.7,52.05 10.45,52.05 10.7,52.3 10.7,53.5 v1(11.9,54.7) ; U6.11@15.1,51.9 15.6,51.9 15.925,52.225 ; v1(15.1,54.5) U6.1@15.1,53.5 15.7,53.5 15.925,53.275 15.925,52.225 ; C12.2@17.7,51.95 C13.2@16.8,51.95 16.2,51.95 15.925,52.225
3V3: C1.2 C2.2 C10.2 C11.2 C16.2 C19.2 C20.2 C36.2 C51.2 DS1.2 L1.2 L11.1 M1.2 M1.3 M1.39 M1.42 M1.43 R4.1 R25.3 R27.1 R30.1 R31.1 R35.1 RP3.2 RP3.4 RP3.6 RP3.8 RP4.2 RP4.4 RP6.2 RP6.4 U4.16 U5.2 U8.1 U8.3 U16.3 | length 61.6
  Top Layer w0.125: v1(1.1,3.4) 1.659,3.4 1.8,3.541 ; v1(1.5,51) C11.2@1.5,51.75 ; R4.1@1.8,3.95 1.8,3.541 ; C16.2@2.1,56.15 4.8,56.15 5.313,55.637 5.313,54.827 4.736,54.25 ; v1(2.2,41.3) 1.45,41.3 C2.2@1.4,41.25 1.4,40.7 1.3,40.6 1.3,39.1 1.4,39 ; M1.3@2.5,37.8 1.475,37.8 1.3,37.975 1.3,38.9 1.4,39 ; M1.2@2.5,39 1.4,39 ; U8.3@3.7,54.25 4.736,54.25 ; C19.2@4.45,3.6 3.85,3 2.341,3 1.8,3.541 ; v1(4.7,12.7) 4.7,12.3 4.9,12.1 6.138,12.1 6.35,12.312 ; v1(5.1,53.2) 5.1,53.886 4.736,54.25 ; RP4.4@6.35,12.725 6.35,12.312 ; RP4.2@6.9,12.725 6.9,12.3 6.7,12.1 6.562,12.1 6.35,12.312 ; 7.1,7.4 7.112,7.388 ; v1(13.8,9.5) 13.8,10.4 14.25,10.85 R31.1@14.9,10.85 R31.1@14.9,10.95 ; v1(18.75,12.15) R30.1@18.75,12.8 ; v1(23.1,19.1) 23.6,18.6 M1.39@24.5,18.6 ; M1.42@24.5,22.2 C1.2@26,22.2 v1(26,22.9) 26,23.2 25.8,23.4 M1.43@24.5,23.4 ; R35.1@26,34.55 v1(26,35.3)
  Top Layer w0.5: 7.112,7.388 7.112,6.788 7.3,6.6 C20.2@7.3,6.15
  Top Layer w0.8: 7.1,7.4 L1.2@7.1,9.5 7.1,10.875 7.625,11.4 v1(9.35,11.4)
  Bottom Layer w0.125: v1(1.5,51) 1.2,51.3 1.2,52.113 1.312,52.225 U5.2@2.2,52.225 ; R25.3@2.9,29.45 2.9,28.5 3.287,28.112 3.688,28.112 v1(3.7,28.1) ; RP3.2@4.4,38.725 4.4,38.312 v1@4.681,38.031 ; v1@4.7,38.05 4.95,38.3 ; RP3.4@4.95,38.725 4.95,38.3 ; RP3.6@5.45,38.725 5.45,38.312 ; RP3.8@6,38.725 6,38.3 5.9,38.2 5.562,38.2 5.45,38.312 ; U4.16@8.675,32.7 U4.16@8.65,32.725 9.925,32.725 10.1,32.9 C10.2@10.1,33.25 10.563,33.25 10.8,33.487 v1(10.8,34.3) ; v1(13,40.5) R27.1@14.05,40.5 ; RP6.2@16.2,34.125 16.2,33.25 16.35,33.1 v1(16.462,33.1) 16.574,33.1 16.75,33.276 RP6.4@16.75,34.125 ; U16.3@24.05,40.15 U16.3@24.1,40.1 ; 4.95,38.3 5.075,38.175 5.313,38.175 5.45,38.312
  Bottom Layer w0.25: L11.1@6,7.7 6.075,7.775 6.075,8.525 C51.2@6.15,8.6 6.2,8.65 6.2,9.1 6.5,9.4 6.8,9.4 7.275,9.875 v1(7.875,9.875)
  Bottom Layer w0.3: v1(21.8,40.6) 22.6,40.6 23.4,41.4 C36.2@24.05,41.4 U16.3@24.05,40.15
  other v1: 4.7,38.1
3V3F: C3.2 C4.2 C52.2 L11.2 U2.20 | length 4.9
  Bottom Layer w0.25: C52.2@7.95,7.7 L11.2@7,7.7 C4.2@7,6.7 C3.2@8,6.7 8.475,7.175 U2.20@9.8,7.175
BAT45: C47.2 J4.2 L9.1 | length 5
  Bottom Layer w0.125: L9.1@24.7,50.5 24.75,50.55 C47.2@25.6,50.55
  Bottom Layer w0.6: J4.2@23.5,50.825 23.5,52 23.8,52.3 24.4,52.3 24.7,52 L9.1@24.7,50.5
BAT45F: C48.2 L9.2 SW1.1 | length 42.5
  Int2 (Sign) w1.25: SW1.1@21.331,9.95 23.4,12.019 23.4,16.5 24.5,17.6 24.5,47.1 24.1,47.5 v1@24.1,48.4
  Bottom Layer w0.125: L9.2@24.7,49.5 25.45,49.5 C48.2@25.6,49.65
  Bottom Layer w0.6: v1(23.9,48.5) v1(24.4,48.5) 24.4,48.576 24.7,48.876 L9.2@24.7,49.5